# Altium PCB ARM_USB_TO_RS232.PcbDoc
Units mm, origin at the board's own origin, x right, y up, seen from the top; angles counter-clockwise.
Board outline 36.83 x 31.75 mm, 2 copper layers (Top Layer, Bottom Layer); 18 components, 14 nets, 69 pads, 11 vias.
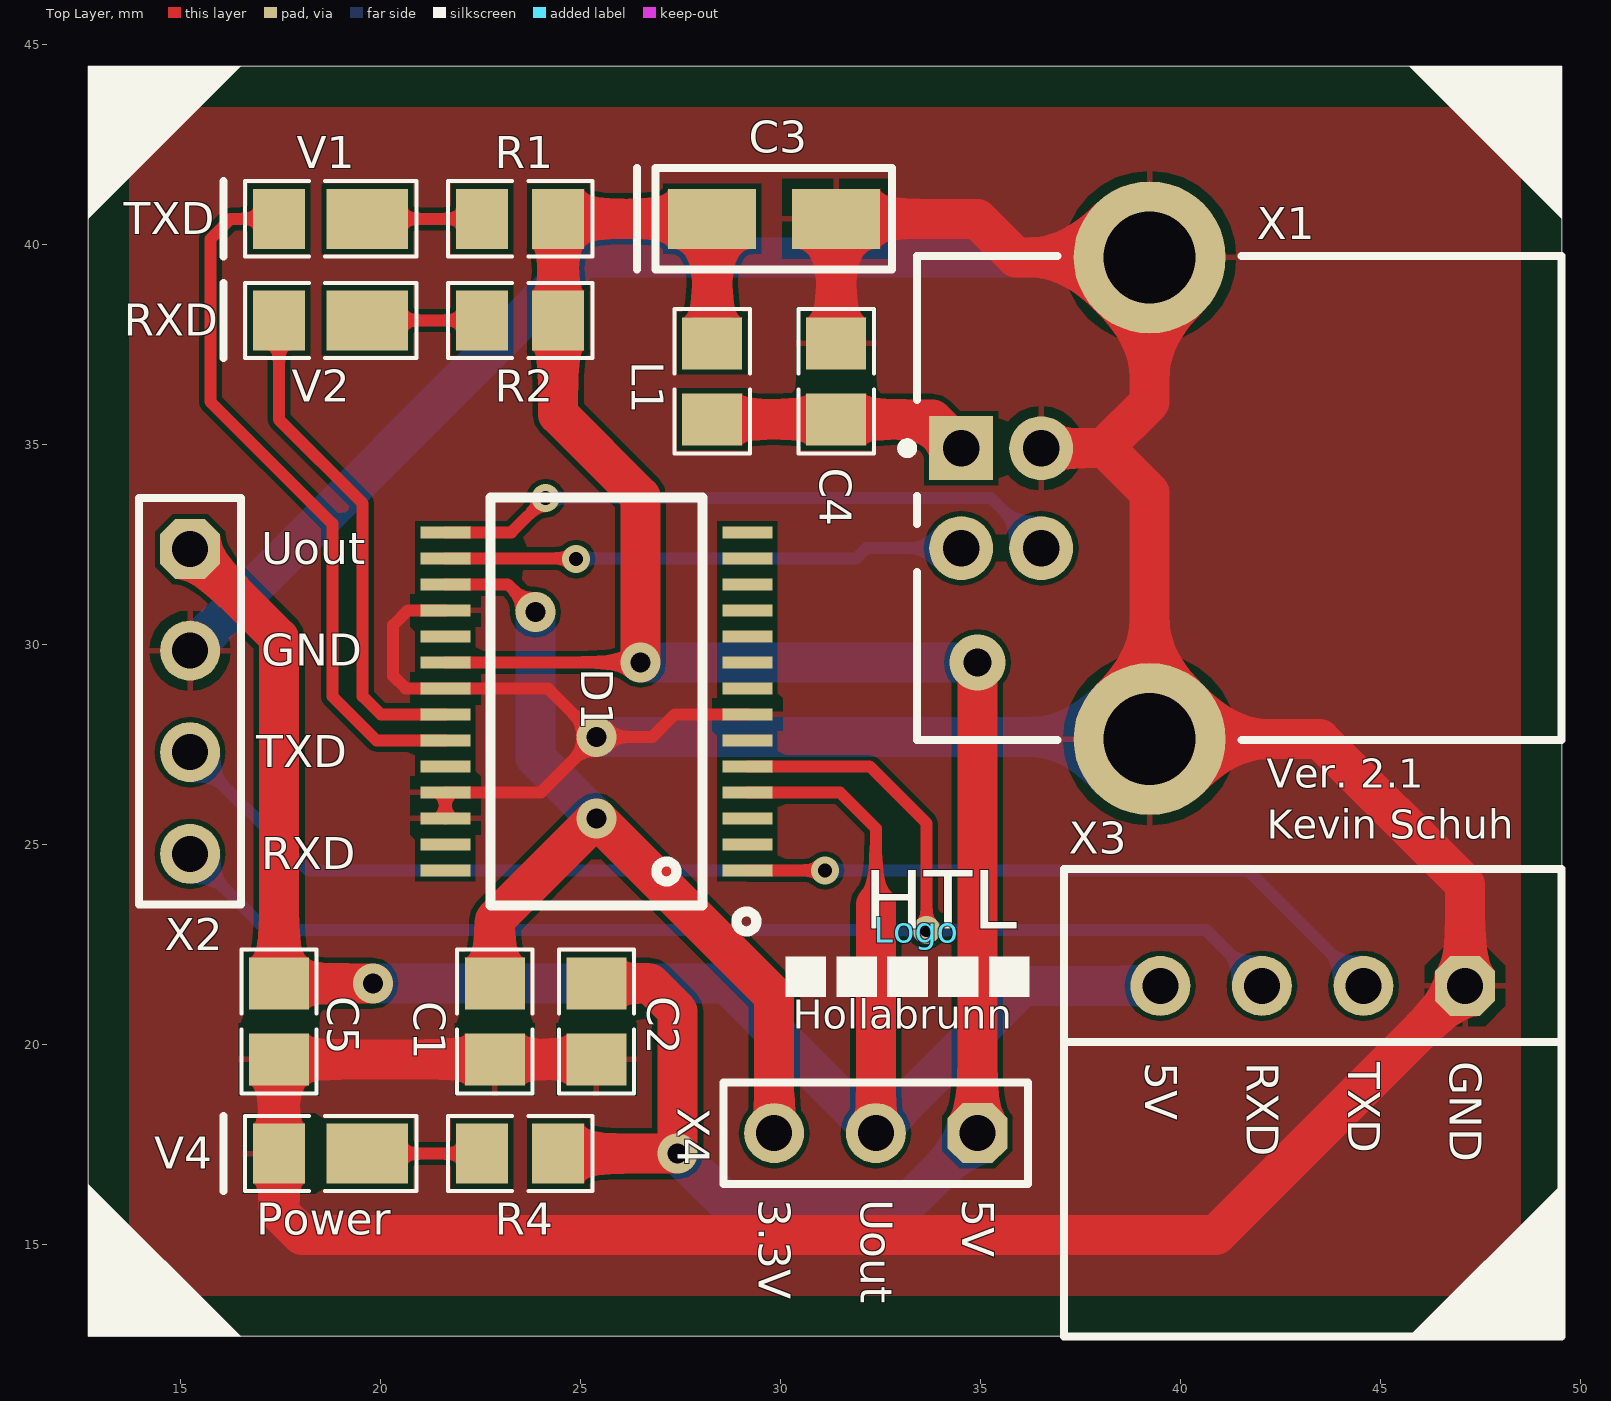
[diagram p0: Top Layer view]
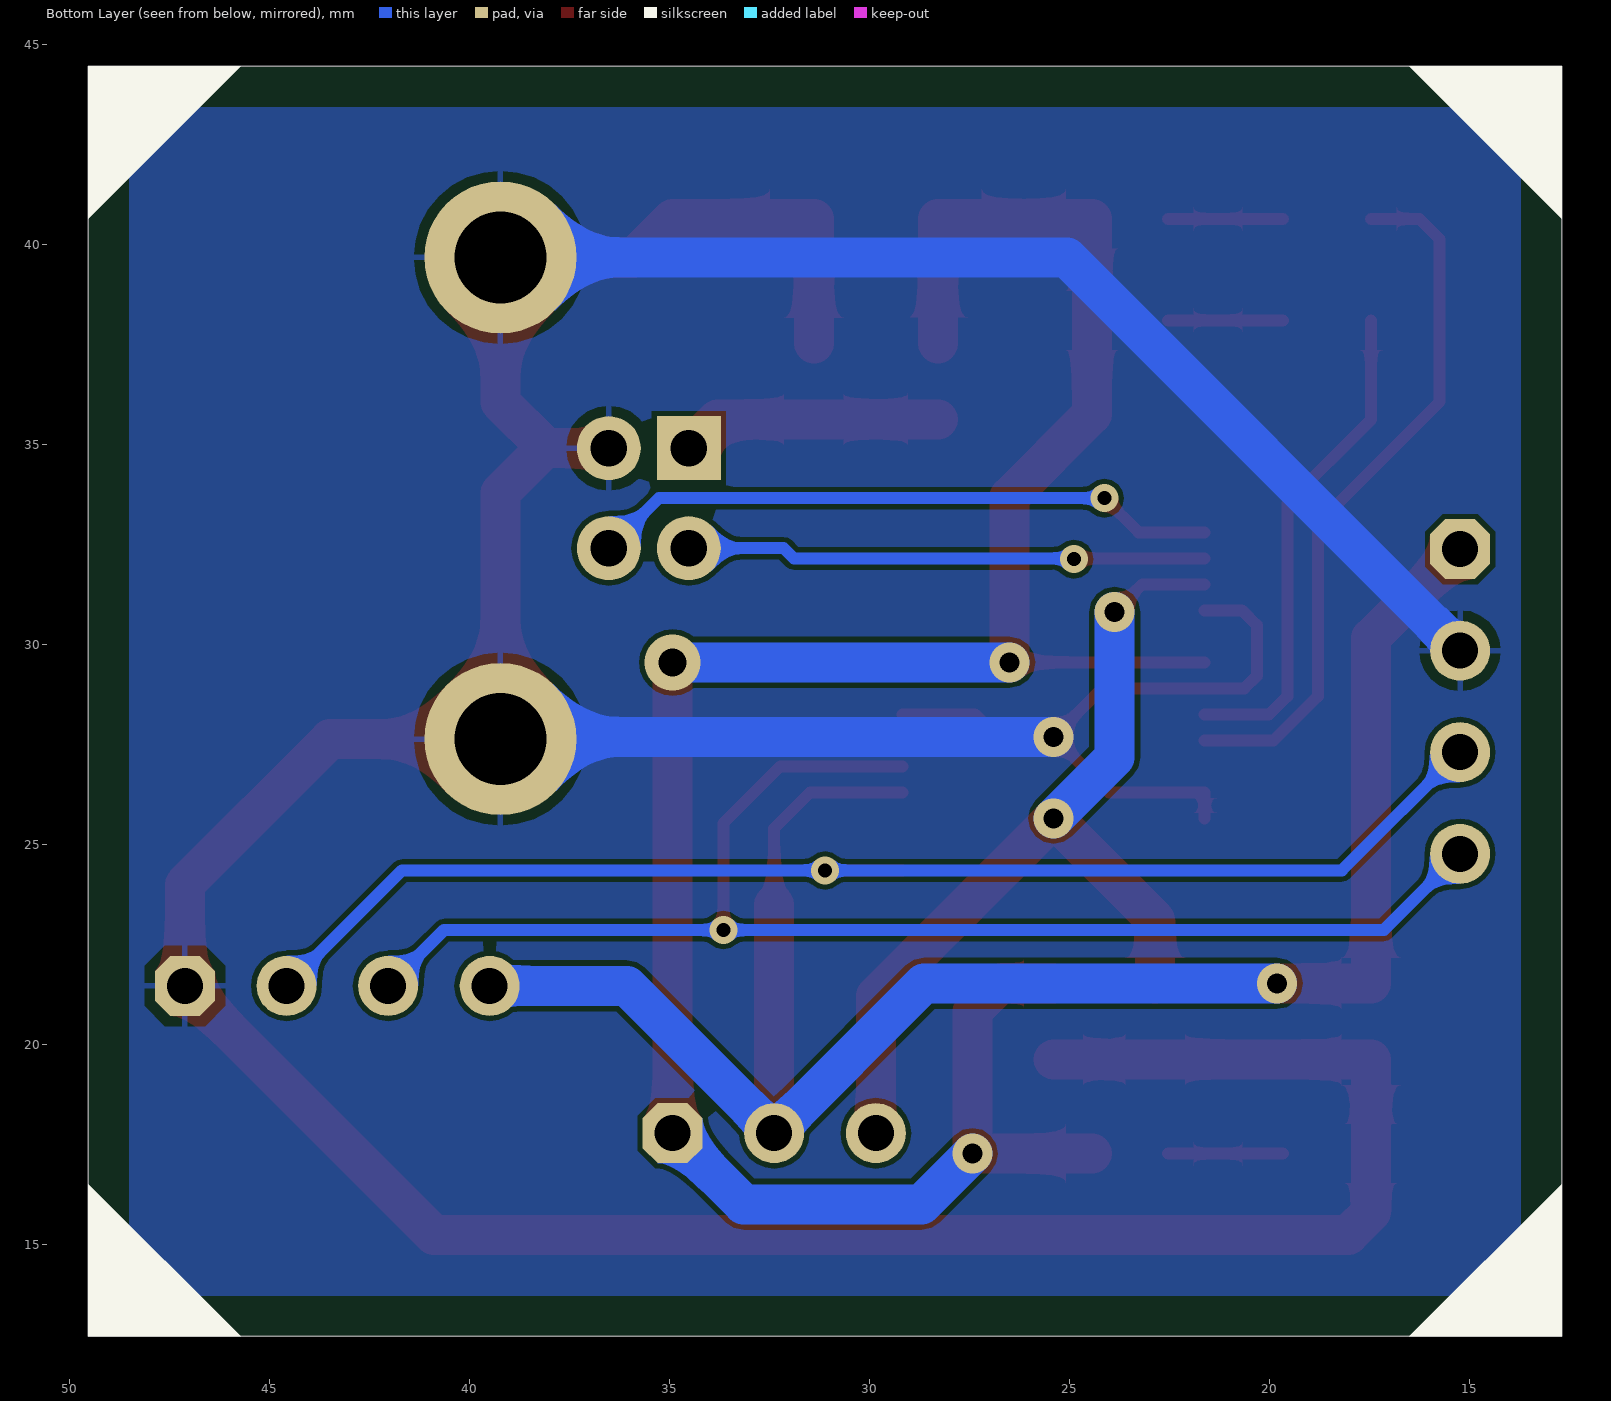
[diagram p1: Bottom Layer view, seen from below]

## Layer stack, top to bottom
Top Solder: solder mask 0.0102, Solder Resist, Dk 3.5
Top Layer: signal copper 0.0356
Dielectric 1: dielectric 0.32, FR-4, Dk 4.8
Bottom Layer: signal copper 0.0356
Bottom Solder: solder mask 0.0102, Solder Resist, Dk 3.5

## Board outline
12.7,44.45 49.53,44.45 49.53,12.7 12.7,12.7

## Design rules (kind name [scope] priority, off if disabled: settings)
Clearance [All] p1: gap=0.125
DiffPairsRouting [All] p1: maxlimit=10 minlimit=0.125 mostfreqgap=0.15 toplayer_minwidth=0.381 toplayer_maxwidth=0.381 toplayer_prefwidth=0.381 bottomlayer_minwidth=0.381 bottomlayer_maxwidth=0.381 bottomlayer_prefwidth=0.381 maxuncoupledlength=12.7
FabricationTestPointUsage FabricationTestPointUsage_1 [All] p1: valid=0 allowmultiple=FALSE
FabricationTestpoint FabricationTestpoint_1 [All] p1: side=3 testpointundercomponent=TRUE minsize=1.016 maxsize=2.54 preferedsize=1.524 minholesize=0 maxholesize=1.016 preferedholesize=0.813 testpointgrid=0.025 allowsidetop=TRUE allowsidebottom=TRUE usegrid=TRUE gridtolerance=0
HoleSize [All] p1: absolutevalues=TRUE maxlimit=6 minlimit=0.2 maxpercent=80.000 minpercent=20.000
HoleSize FabricationTestpoint [All] p2 off: absolutevalues=TRUE maxlimit=2.54 minlimit=0.025 maxpercent=80.000 minpercent=20.000
HoleSize FabricationTestPointUsage [All] p3 off: absolutevalues=TRUE maxlimit=2.54 minlimit=0.025 maxpercent=80.000 minpercent=20.000
MinimumSolderMaskSliver [All] p1: minsoldermaskwidth=0.14
PlaneClearance [All] p1: clearance=0.5
PlaneConnect [All] p1: planeconnectstyle=Relief reliefexpansion=0.4 reliefentries=4 reliefconductorwidth=0.15 reliefairgap=0.15
PolygonConnect GND_Via [IsVia AND InNet('GND')] p1: connectstyle=Direct reliefconductorwidth=0.254 reliefentries=4 polygonreliefangle="90 Angle" airgapwidth=0.254
PolygonConnect [All] p2: connectstyle=Relief reliefconductorwidth=0.15 reliefentries=4 polygonreliefangle="90 Angle" airgapwidth=0.254
RoutingCorners [All] p1: cornerstyle=45-Degree minsetback=1.25 maxsetback=1.25
RoutingVias [All] p1: holewidth=0.3 width=0.6 viastyle="Through Hole" minholewidth=0.2 minwidth=0.45 maxholewidth=0.45 maxwidth=0.75
SilkToSilkClearance [All] p1: silktosilkclearance=0.131
SilkToSolderMaskClearance [IsPad] p1: minsilkscreentomaskgap=0 clearancetoexposedcopper=TRUE
SolderMaskExpansion [All] p1: expansion=0.075
UnpouredPolygon [All] p1: allowunpoured=FALSE
Width GND [InNet('GND')] p1: maxlimit=1.5 minlimit=0.3 preferedwidth=1.5
Width VCC5V [InNet('+5V')] p2: maxlimit=1 minlimit=0.3 preferedwidth=1
Width VCC3.3V [InNet('+3.3V')] p3: maxlimit=1 minlimit=1 preferedwidth=1
Width [All] p4: maxlimit=1 minlimit=0.3 preferedwidth=1
19 further rules are at their usual default settings.

## Components (designator, comment, footprint, x,y, rotation, side; value= is the part's Value field where it differs from the comment)
C1 "Cap_Keramik_SMD" 0805_CAP 22.86,20.574 r270 top
C2 "Cap_Keramik_SMD" 0805_CAP 25.4,20.574 r270 top
C3 "Cap_Pol" 1411_Cap_Pol 29.845,40.64 r0 top
C4 "Cap_Keramik_SMD" 0805_CAP 31.395,36.576 r270 top
C5 "Cap_Keramik_SMD" 0805_CAP 17.465,20.574 r270 top
D1 "FT232RL" SSOP_28 25.4,28.575 r180 top locked
L1 "ferrite bead" 0805_ferrit 28.295,36.576 r90 top
Logo "HTL Hollabrunn" HTL_Logo 33.405,22.86 r0 top
R1 "Res_SMD" 0805_Res 23.495,40.64 r0 top
R2 "Res_SMD" 0805_Res 23.495,38.1 r0 top
R4 "Res_SMD" 0805_Res 23.495,17.272 r0 top
V1 "LED" 0805_LED 18.415,40.64 r180 top
V2 "LED" 0805_LED 18.415,38.1 r180 top
V4 "Power" 0805_LED 18.415,17.272 r180 top
X1 "USB-Buchse Typ B" USB_Buchse_Typ_B 49.53,33.655 r180 top locked
X2 "UART1" HDR1X4 15.24,32.385 r270 top locked
X3 "Nextion" NEXTION 47.117,21.463 r180 top locked
X4 "Header_3" HDR1X3 34.925,17.78 r180 top

## Footprints (in the part's own frame and the unit in brackets; to place one, negate y for a bottom-side part, rotate by r counter-clockwise, add the part's x,y. Pads: shape width x height; smd on the part's side, far side on the other; paste and mask are expansions set on the pad)
0805_CAP [mm]
  rect 1.3x1.5 smd: 1(-0.95,0) 2(0.95,0)
  silkscreen extent -1.8,-0.94 1.8,0.94
0805_ferrit [mm]
  rect 1.3x1.5 smd: 1(-0.95,0) 2(0.95,0)
  silkscreen extent -1.8,-0.94 1.8,0.94
0805_LED [mm]
  rect 2.035x1.5 smd: 1(-1.255,0)
  rect 1.3x1.5 smd: 2(0.95,0)
  silkscreen extent -2.49,-0.94 2.34,0.94
0805_Res [mm]
  rect 1.3x1.5 smd: 1(-0.95,0) 2(0.95,0)
  silkscreen extent -1.8,-0.94 1.8,0.94
1411_Cap_Pol [mm]
  rect 2.2x1.5 smd: 1(-1.55,0) 2(1.55,0)
  silkscreen extent -3.43,-1.27 2.95,1.27
HDR1X3 [mm] "Connector; Header; 3 Position"
  oct 1.5x1.5 hole 0.9: 1(0,0)
  round 1.5 hole 0.9: 2(2.54,0) 3(5.08,0)
  silkscreen extent -1.27,-1.27 6.35,1.27
HDR1X4 [mm] "Connector; Header; 4 Position"
  oct 1.5x1.5 hole 0.9: 1(0,0)
  round 1.5 hole 0.9: 2(2.54,0) 3(5.08,0) 4(7.62,0)
  silkscreen extent -1.27,-1.27 8.89,1.27
HTL_Logo [mm]
  silkscreen extent -3.28,-1.68 2.82,-0.66
NEXTION [mm] "Connector; Header; 4 Position"
  oct 1.5x1.5 hole 0.9: 1(0,0)
  round 1.5 hole 0.9: 2(2.54,0) 3(5.08,0) 4(7.62,0)
  silkscreen extent -2.41,-2.92 10.03,8.76
SSOP_28 [mm] "FTDI - FT232RL"
  rect 1.25x0.3 smd: 1(-3.775,4.225) 2(-3.775,3.575) 3(-3.775,2.925) 4(-3.775,2.275) 5(-3.775,1.625) 6(-3.775,0.975) 7(-3.775,0.325) 8(-3.775,-0.325) 9(-3.775,-0.975) 10(-3.775,-1.625) 11(-3.775,-2.275) 12(-3.775,-2.925) 13(-3.775,-3.575) 14(-3.775,-4.225) 15(3.775,-4.225) 16(3.775,-3.575) 17(3.775,-2.925) 18(3.775,-2.275) 19(3.775,-1.625) 20(3.775,-0.975) 21(3.775,-0.325) 22(3.775,0.325) 23(3.775,0.975) 24(3.775,1.625) 25(3.775,2.275) 26(3.775,2.925) 27(3.775,3.575) 28(3.775,4.225)
  silkscreen extent -4,-5.1 2.65,5.75
USB_Buchse_Typ_B [mm] "USB Buchse Typ B"
  rect 1.6x1.6 hole 0.92: 1(15.01,-1.25)
  round 1.6 hole 0.92: 2(15.01,1.25) 3(13.01,1.25) 4(13.01,-1.25)
  round 3.8 hole 2.3: 5(10.3,6.02) 5(10.3,-6.02)
  silkscreen extent 0,-6.05 16.48,6.05

## Part data
C1 C2 C4 C5: "Capacitor_SMD"
C3: "Polarized Capacitor"
L1: library part Inductor, "Inductor"
Logo: library part "HTL Logo"
R1 R2 R4: "Resistor"
V1 V2: "Typical RED, GREEN, YELLOW, AMBER GaAs LED"
V4: library part LED, "Typical RED, GREEN, YELLOW, AMBER GaAs LED"
X1: library part USB_Buchse_Typ_B, "USB Buchse (A)"
X2 X3: "Header, 4-Pin"
X4: "Header, 3-Pin"

## Via types
v1: diameter 1, hole 0.5, Top Layer to Bottom Layer, tented both sides, 6 vias
v2: diameter 0.7, hole 0.35, Top Layer to Bottom Layer, tented both sides, 4 vias
v3: diameter 1.4, hole 0.7, Top Layer to Bottom Layer, tented both sides, 1 vias

## Nets (pads, with @x,y where several pads share a name; then routed paths per layer and width w, separated by ;. In a path a pad name is that pad's centre, name@x,y a point inside that pad or via, vN(x,y) a via of type N, cw(c..) or ccw(c..) an arc to the next point about the centre after c; other vN are vias at no path point)
+5V: C2.1 C3.1 D1.20 L1.2 R1.2 R2.2 R4.2 X4.1 | length 61.6
  Top Layer w0.3: D1.20 v1(26.502,29.55)
  Top Layer w1: R4.2 v1(27.432,17.272) 27.432,20.828 26.736,21.524 C2.1 ; v1(26.502,29.55) 26.502,33.696 24.445,35.753 R2.2 R1.2 C3.1 L1.2 ; X4.1 v3(34.925,29.55)
  Bottom Layer w1: v1(26.502,29.55) v3(34.925,29.55) ; v1(27.432,17.272) 28.702,16.002 33.147,16.002 X4.1
GND: C1.2 C2.2 C3.2 C4.1 C5.2 D1.7 D1.18 D1.21 D1.25 D1.26 V4.2 X1.4 X1.5 X2.2 X3.1 | length 141.4
  Top Layer w0.3: D1.26 D1.25 24.014,26.3 v1(25.4,27.686) ; D1.18 20.69,30.85 20.32,30.48 20.32,29.21 20.63,28.9 D1.21 24.186,28.9 v1(25.4,27.686) ; D1.7 27.361,28.25 26.797,27.686 v1(25.4,27.686)
  Top Layer w1: C2.2 C5.2 17.465,15.809 18.034,15.24 40.894,15.24 X3.1 47.117,24.003 43.485,27.635 39.23,27.635 39.23,33.795 38.1,34.925 ; C4.1 C3.2 34.925,40.64 35.89,39.675 39.23,39.675 39.23,36.055 38.1,34.925 ; X1.4 38.08,34.905 38.1,34.925
  Bottom Layer w1: X2.2 25.07,39.675 X1.5@39.23,39.675 ; v1(25.4,27.686) 39.179,27.686 X1.5@39.23,27.635
NetC1_1: C1.1 D1.17 X4.3 | length 23.2
  Top Layer w0.3: D1.17 23.182,31.5 v1(23.876,30.806)
  Top Layer w1: C1.1 22.86,23.114 v1(25.4,25.654) 29.845,21.209 X4.3
  Bottom Layer w1: v1(23.876,30.806) 23.876,27.178 v1(25.4,25.654)
NetC4_2: C4.2 L1.1 X1.1 | length 6.5
  Top Layer w1: L1.1 31.014,35.626 C4.2 33.799,35.626 X1.1
NetD1_1: D1.1 X2.3 X3.2 | length 33.7
  Top Layer w0.3: D1.1 v2(31.115,24.35)
  Bottom Layer w0.3: X2.3 18.195,24.35 v2(31.115,24.35) 41.69,24.35 X3.2
NetD1_5: D1.5 X2.4 X3.3 | length 35.9
  Top Layer w0.3: D1.5 32.232,26.95 33.655,25.527 v2(33.655,22.86)
  Bottom Layer w0.3: X2.4 17.145,22.86 v2(33.655,22.86) 40.64,22.86 X3.3
NetD1_15: D1.15 X1.3 | length 15.8
  Top Layer w0.3: D1.15 23.275,32.8 v2(24.13,33.655)
  Bottom Layer w0.3: v2(24.13,33.655) 35.27,33.655 X1.3
NetD1_16: D1.16 X1.2 | length 13
  Top Layer w0.3: D1.16 v2@24.892,32.15
  Bottom Layer w0.3: v2@24.892,32.15 31.896,32.15 32.151,32.405 X1.2
  other v2: 24.892,32.131
NetR1_1: R1.1 V1.1 | length 2.9
  Top Layer w0.3: V1.1 R1.1
NetR2_1: R2.1 V2.1 | length 2.9
  Top Layer w0.3: V2.1 R2.1
NetR4_1: R4.1 V4.1 | length 2.9
  Top Layer w0.3: V4.1 R4.1
RXD: D1.22 V2.2 | length 12.5
  Top Layer w0.3: V2.2 17.465,35.621 19.558,33.528 19.558,28.702 20.01,28.25 D1.22
TXD: D1.23 V1.2 | length 17.9
  Top Layer w0.3: V1.2 16.256,40.64 15.748,40.132 15.748,36.068 18.796,33.02 18.796,28.702 19.898,27.6 D1.23
UOUT: C5.1 D1.4 X2.1 X3.4 X4.2 | length 48.1
  Top Layer w0.3: D1.4 31.485,26.3 32.385,25.4 32.385,23.495
  Top Layer w1: X2.1 17.465,30.16 C5.1 v1(19.812,21.524) ; X4.2 32.385,23.495
  Bottom Layer w1: v1(19.812,21.524) 28.641,21.524 X4.2 36.068,21.463 X3.4
pads on no net: D1.2 D1.3 D1.6 D1.8 D1.9 D1.10 D1.11 D1.12 D1.13 D1.14 D1.19 D1.24 D1.27 D1.28

## Polygon pours and split planes (outlines as drawn)
GND on Top Layer "GND_Plane_Top" (solid, remove dead copper, pour order 2): 13.716,43.434 48.514,43.434 48.514,13.716 13.716,13.716
GND on Bottom Layer "GND_Plane_Bottom" (solid, remove dead copper, pour order 4): 13.716,13.716 48.514,13.716 48.514,43.434 13.716,43.434

## Silkscreen, mask and mechanical layers (free items; w line width, h text height)
Top Overlay:
  region: 49.53,16.51 45.72,12.7 49.53,12.7
  region: 16.51,12.7 12.7,16.51 12.7,12.7
  region: 45.72,44.45 49.53,40.64 49.53,44.45
  region: 12.7,40.64 16.51,44.45 12.7,44.45
  text "TXD" at 13.589,40.259 h0.8
  text "RXD" at 13.589,37.719 h0.8
  text "Ver. 2.1" at 42.164,26.162 h1.25
  text "Kevin Schuh" at 42.164,24.892 h1.25
  text "Power" at 16.891,15.24 h0.8
Bottom Overlay:
  region: 49.53,16.51 45.72,12.7 49.53,12.7
  region: 16.51,12.7 12.7,16.51 12.7,12.7
  region: 45.72,44.45 49.53,40.64 49.53,44.45
  region: 12.7,40.64 16.51,44.45 12.7,44.45
Mechanical 1:
  the board outline again, w0.254
Mechanical 4:
  text "base material FR4" at 58.42,40.64 h1.52
  text "double-sided Cu-cald 1x35um" at 58.42,38.1 h1.52
  text "pcb-thickness 1.6mm" at 58.42,35.56 h1.52
  text "print +/- 0,05 mm" at 58.42,33.02 h1.52
  text "outline +/- 0,1 mm" at 58.42,30.48 h1.52
  text "key" at 58.42,22.86 h1.52
  text "all dimensions in mm" at 58.42,17.78 h1.52
Drill Drawing:
  text ".legend" at 58.42,20.32 h1.52

## Dimensions
12.7,0 to 0,0 on Mechanical 2
12.7,12.7 to 0,0 on Mechanical 2
49.53,12.7 to 12.7,12.7 on Mechanical 2
12.7,12.7 to 12.7,44.45 on Mechanical 2

## Text inside footprints (layer, text, board x,y; h text height)
Logo: Top Overlay "HTL" at 32.084,22.403 h2.5; Top Overlay "Hollabrunn" at 30.306,20.142 h1.25
X2: Top Overlay "GND" at 17.018,29.464 h0.8; Top Overlay "TXD" at 16.891,26.924 h0.8; Top Overlay "RXD" at 17.018,24.384 h0.8; Top Overlay "Uout" at 17.018,32.004 h0.8
X3: Top Overlay "5V" at 39.116,19.558 h0.8 r270; Top Overlay "RXD" at 41.656,19.558 h0.8 r270; Top Overlay "TXD" at 44.196,19.558 h0.8 r270; Top Overlay "GND" at 46.736,19.581 h0.8 r270
X4: Top Overlay "3.3V" at 29.464,16.129 h0.8 r270; Top Overlay "5V" at 34.544,16.129 h0.8 r270; Top Overlay "Uout" at 32.004,16.129 h0.8 r270